# Altium PCB PCB1.PcbDoc (part 2 of 2)
Units mil, origin at the board's own origin, x right, y up, seen from the top; angles counter-clockwise.
Board outline 3190 x 3156 mil, 4 copper layers (Component Side, Ground Plane, Power Plane, Solder Side), stack 33.234 mil thick; 104 components, 96 nets, 451 pads, 130 vias.
Unrouted connection lines stored in the file: 23.
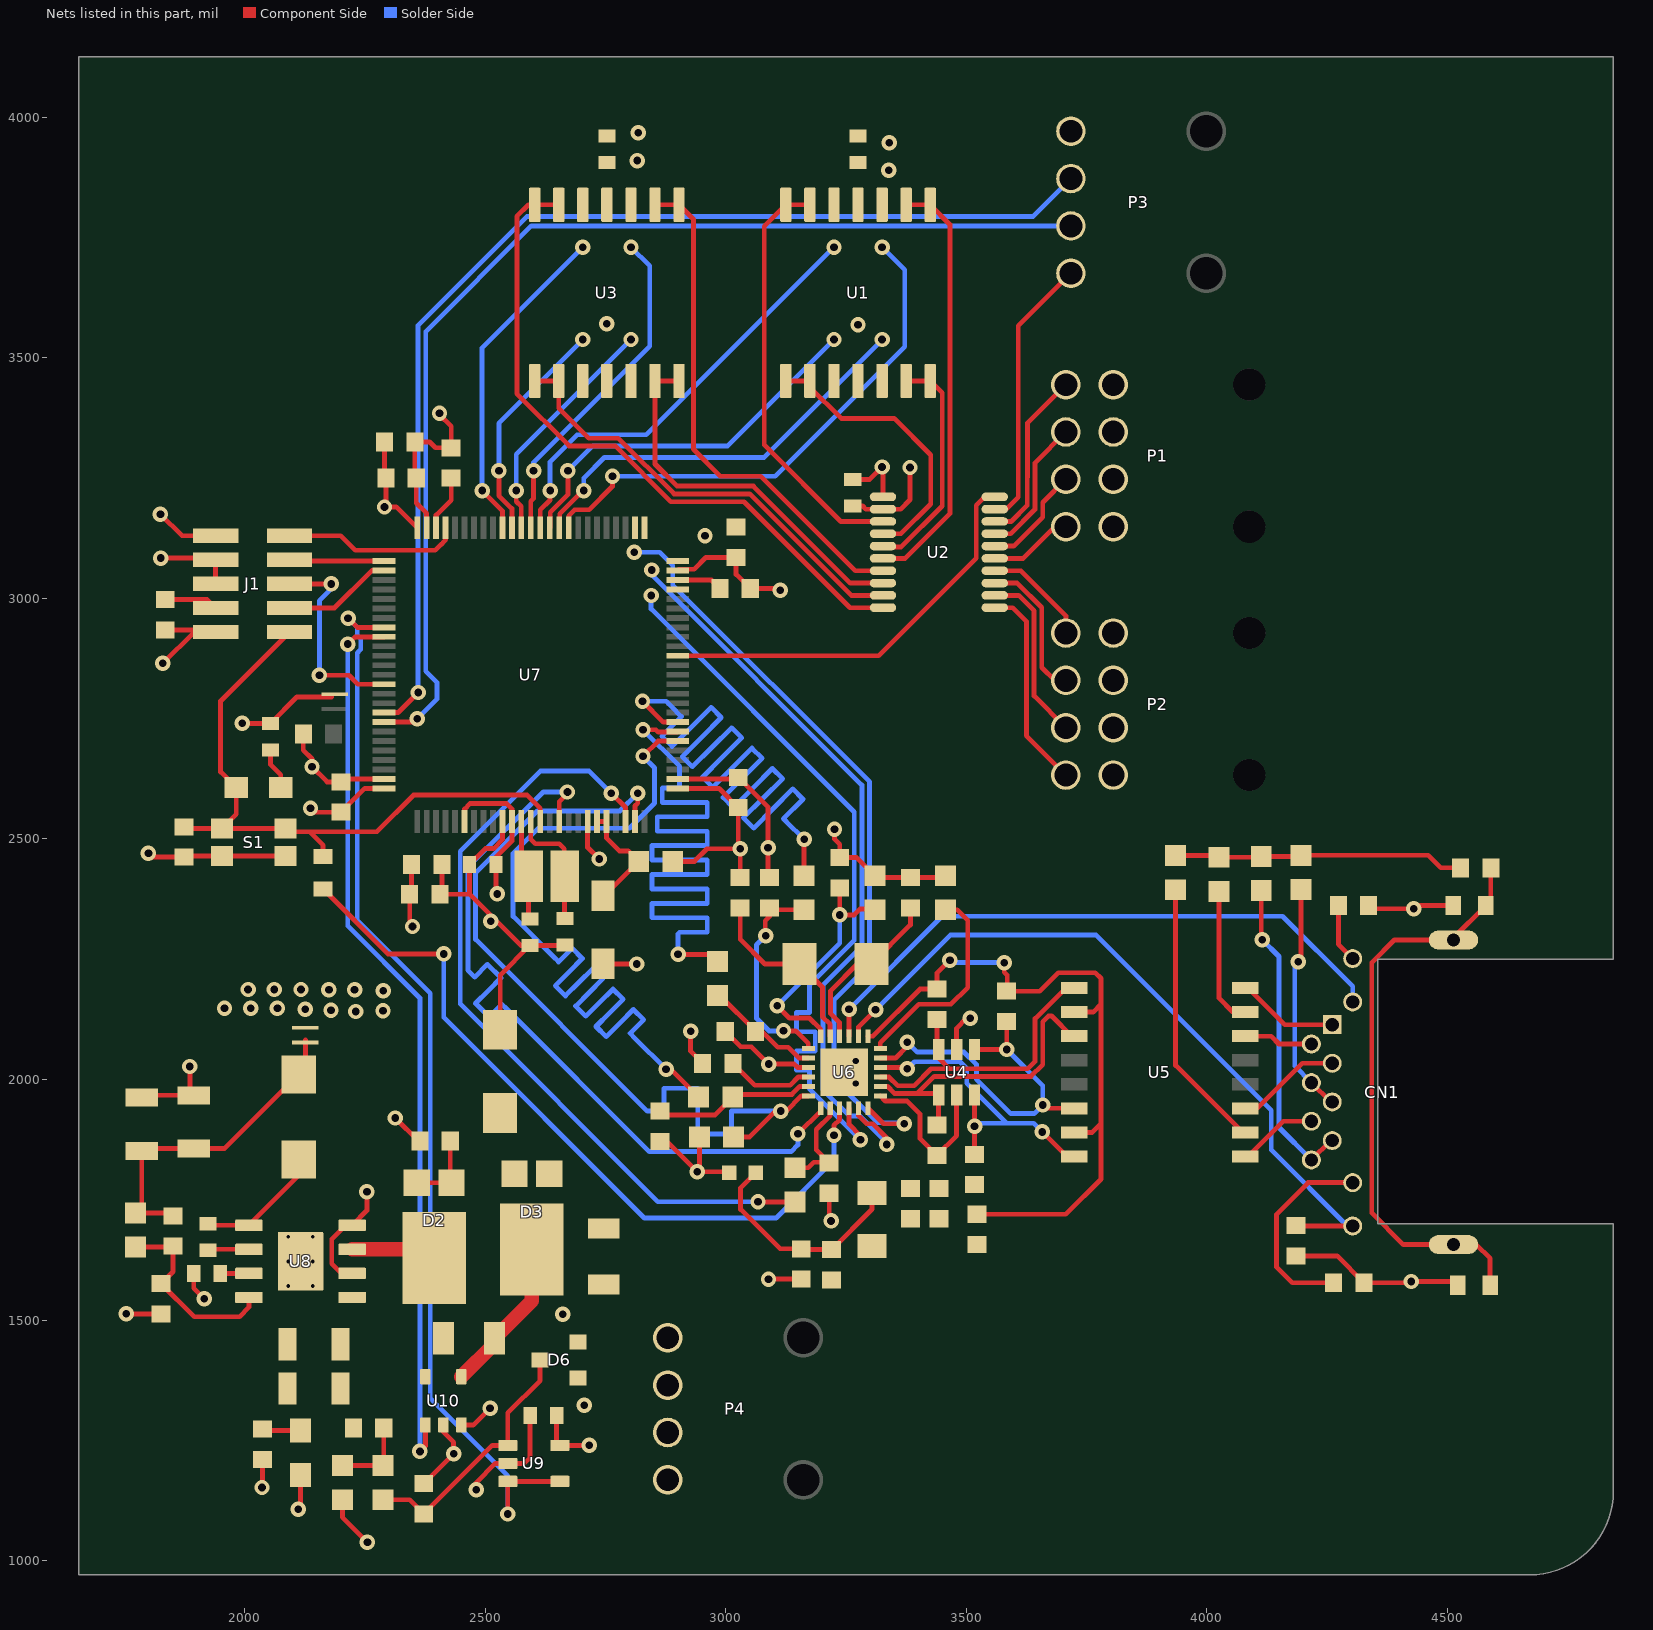
[diagram p4: the nets of this part, all layers, seen from the top]

## Via types
v1: diameter 32, hole 16, Component Side to Solder Side, 84 vias
v2: diameter 32, hole 16, Component Side to Solder Side, tented both sides, 38 vias
v3: diameter 19.68, hole 7.87, Component Side to Solder Side, tented top, 6 vias
v4: diameter 25.98, hole 12.99, Component Side to Solder Side, 2 vias

## Nets (pads, with @x,y where several pads share a name; then routed paths per layer and width w, separated by ;. In a path a pad name is that pad's centre, name@x,y a point inside that pad or via, vN(x,y) a via of type N, cw(c..) or ccw(c..) an arc to the next point about the centre after c; other vN are vias at no path point) (continued)
CURR_SENSE_BATT: U7.84 U10.1 | length 1881.2
  Component Side w10: v1(2214.48,2905) 2229.48,2920 U7.84@2289.76,2920 ; v1(2364.39,1226.9) 2375.67,1238.18 U10.1@2375.67,1281.7
  Solder Side w10: v1(2214.48,2905) 2214.48,2319.22 2364.39,2169.32 v1(2364.39,1226.9)
EGND: C10.1 CN1.13 CN1.14 SB2.1 SB3.1 | length 1232.5
  Component Side w10: SB2.1@4588.75,1572.41 4588.75,1628.15 4560.09,1656.81 CN1.14@4512.62,1656.81 4408.66,1656.81 4342.87,1722.59 4342.87,2242.87 4389.88,2289.88 CN1.13@4512.62,2289.88 4512.62,2293.99 SB3.1@4580,2361.38 4590.25,2371.62 C10.1@4590.25,2440
ESC1_5V: P1.1 U2.18 | length 365.9
  Component Side w10: U2.18@3559.14,3159.8 3593.52,3159.8 3626.85,3193.13 3626.85,3251.66 3627,3251.81 3627,3364.21 P1.1@3707.06,3444.28
ESC1_BUF: U1.13 U1.14 U2.3 | length 880.6
  Component Side w10: U1.13@3175,3818.07 U1.14@3125,3818.07 3079.92,3772.99 3079.92,3319.08 3239.2,3159.8 U2.3@3326.86,3159.8
ESC1_SIG: U1.12 U7.62 | length 920.8
  Component Side w10: U7.62@2614.57,3146.38 2614.57,3184 2635,3204.43 v2(2635,3224)
  Solder Side w10: v2(2635,3224) 2635,3284 2691,3340 2835,3340 v2(3225,3730)
ESC2_5V: P1.2 U2.17 | length 292.3
  Component Side w10: U2.17@3559.14,3134.21 3592.21,3134.21 3642.85,3184.85 3642.85,3245.04 3643,3245.19 3643,3281.79 P1.2@3707.06,3345.85
ESC2_BUF: U1.1 U1.2 U2.4 | length 599
  Component Side w10: U1.1@3125,3451.93 U1.2@3175,3451.93 3175,3439 3240,3374 3350,3374 3426,3298 3426,3196.13 3364.09,3134.21 U2.4@3326.86,3134.21
ESC2_SIG: U1.3 U7.61 | length 800.3
  Component Side w10: U7.61@2634.25,3146.38 2635.25,3147.38 2635.25,3178.63 2672,3215.38 v2(2672,3265)
  Solder Side w10: v2(2672,3265) 2724,3317 3004,3317 v2(3225,3538)
ESC3_5V: P1.3 U2.16 | length 223.2
  Component Side w10: U2.16@3559.14,3108.62 3598.62,3108.62 3658.85,3168.85 3658.85,3199.21 P1.3@3707.06,3247.43
ESC3_BUF: U1.6 U1.7 U2.5 | length 479.3
  Component Side w10: U2.5@3326.86,3108.62 3328.48,3107 3365,3107 3450,3192 3450,3426.93 U1.7@3425,3451.93 U1.6@3375,3451.93
ESC3_SIG: U1.5 U7.60 | length 865.1
  Component Side w10: U7.60@2653.94,3146.38 2654.94,3147.38 2654.94,3175.69 2703.25,3224 v2(2705,3224)
  Solder Side w10: v2(2705,3224) 2705,3250 2748,3293 3080,3293 v2(3325,3538)
ESC4_5V: P1.4 U2.15 | length 175.3
  Component Side w10: U2.15@3559.17,3083 3618,3083 3684,3149 P1.4@3707.06,3149
ESC4_BUF: U1.8 U1.9 U2.6 | length 886.8
  Component Side w10: U2.6@3326.86,3083.03 3373.25,3083.03 3466,3175.78 3466,3777.07 U1.8@3425,3818.07 U1.9@3375,3818.07
ESC4_SIG: U1.10 U7.59 | length 1108.2
  Component Side w10: U7.59@2673.62,3146.38 2673.62,3171.75 2685.87,3184 2716,3184 2764.69,3232.69 v2(2764.69,3254)
  Solder Side w10: v2(2764.69,3254) 3103,3254 3372,3523 3372,3683 v2(3325,3730)
ESC5_5V: P2.1 U2.14 | length 222.7
  Component Side w10: U2.14@3559.14,3057.44 3613.56,3057.44 3707.06,2963.94 P2.1@3707.06,2927.92
ESC5_BUF: U2.7 U3.8 U3.9 | length 1069
  Component Side w10: U3.9@2853,3818.07 U3.8@2903,3818.07 2933,3788.07 2933,3310 2989,3254 3072.62,3254 3269.18,3057.44 U2.7@3326.86,3057.44
ESC5_SIG: U3.10 U7.63 | length 702.1
  Component Side w10: U7.63@2594.88,3146.38 2594.88,3201.97 2600.63,3207.72 v2(2600.63,3265)
  Solder Side w10: v2(2600.63,3265) 2600.63,3282.63 2842,3524 2842,3691 v2(2803,3730)
ESC6_5V: P2.2 U2.13 | length 304.8
  Component Side w10: U2.13@3559.14,3031.85 3606.15,3031.85 3657,2981 3657,2856.25 3683.76,2829.49 P2.2@3707.06,2829.49
ESC6_BUF: U2.8 U3.6 U3.7 | length 799
  Component Side w10: U3.7@2903,3451.93 U3.6@2853,3451.93 2853,3279.25 2898.81,3233.45 3057.55,3233.45 3259.15,3031.85 U2.8@3326.86,3031.85
ESC6_SIG: U3.5 U7.64 | length 494.7
  Component Side w10: v2(2564.63,3224) 2564.63,3201.37 2575,3191 2575,3146.57 U7.64@2575.2,3146.38
  Solder Side w10: v2(2564.63,3224) 2564.63,3299.63 v2(2803,3538)
ESC7_5V: P2.3 U2.12 | length 365.7
  Component Side w10: U2.12@3559.14,3006.26 3609.11,3006.26 3641,2974.37 3641,2797.13 P2.3@3707.06,2731.07
ESC7_BUF: U2.9 U3.1 U3.2 | length 941.4
  Component Side w10: U3.1@2603,3451.93 U3.2@2653,3451.93 2653,3395.63 2715.63,3333 2776.63,3333 2892.63,3217 3050,3217 3260.74,3006.26 U2.9@3326.86,3006.26
ESC7_SIG: U3.3 U7.65 | length 475
  Component Side w10: v2(2528.63,3265) 2528.63,3213.37 2555.51,3186.49 U7.65@2555.51,3146.38
  Solder Side w10: v2(2528.63,3265) 2528.63,3363.63 v2(2703,3538)
ESC8_5V: P2.4 U2.11 | length 431.1
  Component Side w10: U2.11@3559.14,2980.67 3596.33,2980.67 3625,2952 3625,2714.71 P2.4@3707.06,2632.64
ESC8_BUF: U2.10 U3.13 U3.14 | length 1410.7
  Component Side w10: U3.13@2653,3818.07 U3.14@2603,3818.07 2590.07,3818.07 2566,3794 2566,3425.35 2674.35,3317 2770,3317 2886,3201 3038,3201 3258.33,2980.67 U2.10@3326.86,2980.67
ESC8_SIG: U3.12 U7.66 | length 687.8
  Component Side w10: v2(2493.63,3224) 2535.83,3181.8 U7.66@2535.83,3146.38
  Solder Side w10: v2(2493.63,3224) 2493.63,3520.63 v2(2703,3730)
GND: C1.2 C2.2 C3.2 C4.2 C5.1 C6.1 C7.1 C8.1 C9.1 C11.2 C12.2 C13.1 C14.1 C15.1 C16.1 C17.1 C18.1 C19.1 C20.1 C21.1 C22.1 C23.1 C24.1 C25.1 C26.2 C27.1 C29.1 C30.1 C32.1 C33.1 C34.1 C35.1 C36.2 C37.1 D5.2 D6.1 J1.3 J1.5 J1.9 P1.5 P1.6 P1.7 P1.8 P2.5 P2.6 P2.7 P2.8 P3.4 P4.1 P4.2 R10.1 R16.2 R20.1 R21.1 R22.1 R23.1 R25.2 R26.1 R27.1 R31.1 R32.1 S1.2 SB2.2 SB3.2 U1.11 U2.1 U3.11 U4.2 U6.25 U7.10 U7.19 U7.26 U7.49 U7.74 U7.99 U8.6 U8.8 U8.9 U9.2 U10.2 | length 5235.7
  Component Side w10: v1(1754.06,1512.81) R31.1@1826.22,1512.81 ; C33.1@1786.22,1962.02 1791.22,1967.02 C32.1@1894.4,1967.02 1886.22,1975.19 v1(1886.22,2026.9) ; v1(1800,2470) 1807.91,2462.09 C18.1@1873.98,2462.09 1876.57,2464.69 S1.2@1952.91,2464.69 S1.2@2084.8,2464.69 ; v1(1825.83,3083.74) 1936.01,3083.74 J1.3@1939.75,3080 J1.5@1939.75,3030 ; v1(1830,2865) 1895,2930 J1.9@1939.75,2930 1935.22,2934.53 R23.1@1835,2934.53 R23.1@1830,2929.53 ; C35.1@1894.4,1596.9 1894.4,1566.13 v1(1916.22,1544.3) ; v1(2036.22,1151.9) 2037.48,1153.16 R27.1@2037.48,1210.4 ; R25.2@2121.97,2718.11 2121.97,2684.63 2140,2666.6 v1(2140,2650) 2171.47,2618.53 C21.1@2200,2618.53 2200,2624.72 U7.99@2289.76,2624.72 ; R32.1@2203.23,1126.46 2203.23,1089.89 v1(2255.22,1037.9) ; U8.6@2223.5,1596.9 2201.22,1596.9 2181.22,1616.9 2181.22,1668.16 2209.96,1696.9 U8.8@2223.5,1696.9 2254.25,1727.65 v1(2254.25,1766.9) ; v1(2313.31,1919.86) 2360.92,1872.25 R26.1@2364.39,1872.25 ; C34.1@2372.36,1159.89 v1(2434.37,1221.9) 2434.37,1246.09 2413.07,1267.39 U10.2@2413.07,1281.7 ; U7.74@2378.35,3146.38 2378.35,3176.65 2356.73,3198.27 C20.1@2356.73,3250 2353.78,3252.95 C23.1@2353.78,3325 2384.79,3325 2396.8,3312.99 C25.1@2429.32,3312.99 2429.32,3357.81 2405,3382.13 v1(2405,3385) ; C22.1@2410,2447 2410,2388.94 C27.1@2406.06,2385 2468.06,2385 ; v1(2481.22,1146.9) 2481.22,1161.9 2521.22,1201.9 U9.2@2547.09,1201.9 2581.22,1201.9 2593.44,1214.12 C36.2@2593.44,1301.9 ; D5.2@2531.22,2103.51 2531.22,2216.96 C16.1@2592.91,2278.65 C17.1@2665.46,2278.65 ; U7.10@2535.83,2536.14 2535.83,2498.45 2517.37,2480 2500.44,2480 C37.1@2467.44,2447 2467.44,2385.62 2468.06,2385 ; 2574.41,2278.65 2524.06,2329 v1(2511.54,2329) 2511.54,2341.52 2468.06,2385 ; D6.1@2692.95,1379.5 D6.1@2693.45,1379 ; U7.19@2712.99,2536.14 2712.99,2482.15 v1(2736.81,2458.33) ; C26.2@2890,2453.23 2934.82,2453.23 2961.09,2479.5 v1(3030,2479.5) ; U7.26@2900,2605.04 2986.02,2605.04 C7.1@3026.02,2565.04 3026.02,2483.48 v1(3030,2479.5) ; U7.49@2900,3057.8 2902.69,3060.48 2934.5,3060.48 2959.02,3085 C19.1@3021.42,3085 3021.42,3049.92 C24.1@3050.94,3020.39 3109.81,3020.39 v1(3113.2,3017) ; v1(2927,2100) 2927,2058.59 R10.1@2952.01,2033.58 ; C15.1@3030,2419.55 v1(3030,2479.5) ; v1(3089,1585) C13.1@3157,1585.01 ; v1(3226,2520) 3226,2500 3237,2489 C12.2@3237,2461.19 3272.46,2461.19 C6.1@3310.17,2423.49 3314.1,2419.55 C5.1@3384,2419.55 3453.06,2419.55 R16.2@3457,2423.49 ; C1.2@3264,3247.12 3299.12,3247.12 v1(3325,3273) 3326.86,3271.14 U2.1@3326.86,3210.98 ; U4.2@3479.82,2062.24 3479.82,2106.55 3500.27,2127 v1(3508,2127) ; R21.1@4185,1633.19 4270.71,1633.19 R22.1@4326.5,1577.41 4422.41,1577.41 v1(4425,1580) 4513.66,1580 SB2.2@4521.25,1572.41 ; R20.1@4336.5,2361.38 4342.87,2355 v1(4430,2355) 4436.38,2361.38 SB3.2@4512.5,2361.38
  other v1: 2706,1323 3339,3890 2816,3910
  other v3: 2090.63,1570.72 2141.81,1570.72 2090.63,1621.9 2141.81,1621.9 2090.63,1673.08 2141.81,1673.08
  other v4: 3270.13,1991.38 3270.13,2038.62
I2C1_SCL: P3.3 U7.92 | length 2334.6
  Component Side w10: U7.92@2289.76,2762.52 2318.78,2762.52 v1(2360.59,2804.33)
  Solder Side w10: v1(2360.59,2804.33) 2360.59,3567.59 2587,3794 3638.93,3794 P3.3@3717.5,3872.57
I2C1_SDA: P3.2 U7.93 | length 2335.2
  Component Side w10: U7.93@2289.76,2742.83 2351.93,2742.83 v1(2358.66,2749.57)
  Solder Side w10: v1(2358.66,2749.57) 2399.79,2790.69 2399.79,2825.21 2376.59,2848.41 2376.59,3554.59 2596.15,3774.15 P3.2@3717.5,3774.15
LOGIC_EN: U2.20 U7.40 | length 860.4
  Component Side w10: U7.40@2900,2880.63 3317.63,2880.63 3520.58,3083.58 3520.58,3193.62 3537.95,3210.98 U2.20@3559.14,3210.98
NetC4_1: C4.1 C8.2 C9.2 C11.1 C13.2 C14.2 L1.1 R1.2 R2.2 R6.2 R7.2 U4.5 U5.2 U5.7 U6.1 U6.19 | length 2285.6
  Component Side w10: L1.1@3062,1806 3031,1775 3031,1730 3113,1648 C13.2@3157,1648 3158.5,1646.5 C14.2@3220.3,1646.5 3304,1730.2 C11.1@3304,1763.98 ; U6.1@3295.73,2089.8 3305.8,2089.8 3403.99,2187.99 R7.2@3439,2187.99 3439,2221 v1(3466,2248) ; U6.19@3321.32,1965.79 3332.1,1955 3377,1955 3404,1928 3404,1877.01 R2.2@3439,1842.01 3479.82,1882.83 U4.5@3479.82,1967.76 ; C9.2@3522,1719.8 3706.8,1719.8 3780,1793 3780,1908 ; v1(3579,2242.87) 3579,2223 3585,2217 3585,2184.5 R6.2@3584,2183.5 3652.5,2183.5 3691,2222 3768,2222 3780,2210 3780,2156.33 ; U5.7@3724.88,1890 3762,1890 3780,1908 ; U5.2@3724.88,2140 3763.67,2140 3780,2156.33 ; 3780,1908 3780,2156.33
  Solder Side w10: v1(3466,2248) 3471.13,2242.87 v1(3579,2242.87)
NetC5_2: C5.2 U6.4 X1.2 | length 360.2
  Component Side w10: U6.4@3236.67,2089.8 3236.67,2118.33 3218,2137 3218,2184.17 3273.83,2240 X1.2@3302.8,2240 3384,2321.2 C5.2@3384,2356.56
NetC6_2: C6.2 C12.1 U6.6 | length 502.5
  Component Side w10: v1(3107,2153) 3132.2,2127.8 3173.46,2127.8 3197.3,2103.96 U6.6@3197.3,2089.8 ; C12.1@3237,2398.2 v1(3237,2342) 3267,2342 3279,2354 3308.79,2354 C6.2@3310.17,2352.62
  Solder Side w10: v1(3107,2153) 3237,2283 v1(3237,2342)
NetC10_2: C10.2 R11.1 R12.1 R13.1 R14.1 | length 606.1
  Component Side w10: R11.1@3935,2465.33 4021.46,2465.33 R12.1@4025,2461.79 4111.58,2461.79 R14.1@4113.15,2463.36 4193.27,2463.36 R13.1@4195.78,2465.87 4460.33,2465.87 4486.2,2440 C10.2@4527.25,2440
NetC15_2: C15.2 U6.5 X1.1 | length 386.5
  Component Side w10: C15.2@3030,2356.56 3030,2291 3081,2240 X1.1@3153.2,2240 3201,2192.2 3201,2130.7 3216.99,2114.72 U6.5@3216.99,2089.8
NetC24_2: C24.2 U7.48 | length 95.3
  Component Side w10: U7.48@2900,3038.11 2970.23,3038.11 C24.2@2987.95,3020.39
NetC25_2: C25.2 U7.73 | length 116.6
  Component Side w10: U7.73@2398.03,3146.38 2398.03,3173.03 2429.32,3204.32 C25.2@2429.32,3250
NetC28_1: C28.1 L2.1 U8.1 | length 265.3
  Component Side w10: C28.1@1924.33,1700.36 1927.8,1696.9 U8.1@2008.94,1696.9 2112.48,1800.44 L2.1@2112.48,1833.31
NetC28_2: C28.2 U8.2 | length 85.3
  Component Side w10: C28.2@1924.33,1645.24 1925.98,1646.9 U8.2@2008.94,1646.9
NetC31_1: C31.1 R28.1 R31.2 U8.4 | length 406.9
  Component Side w10: C31.1@1772.9,1651.46 1849.29,1651.46 R28.1@1851.22,1653.39 1851.22,1600.8 R31.2@1826.22,1575.8 1895.12,1506.9 1989.49,1506.9 2008.94,1526.35 U8.4@2008.94,1546.9
NetC31_2: C31.2 C32.2 C33.2 J3.1 L2.2 R28.2 | length 684.8
  Component Side w10: R28.2@1851.22,1716.39 1845.28,1722.33 C31.2@1772.9,1722.33 1786.22,1735.65 C33.2@1786.22,1851.78 1791.22,1856.78 C32.2@1894.4,1856.78 1958.78,1856.78 L2.2@2112.48,2010.48 2126.22,2024.22 2126.22,2081.82
NetC34_2: C34.2 D6.3 R30.2 U9.1 | length 536
  Component Side w10: R30.2@2287.69,1126.46 2342.8,1126.46 C34.2@2372.36,1096.9 2514.76,1239.3 U9.1@2547.09,1239.3 2547.09,1307.02 2614.21,1374.14 D6.3@2614.21,1416.9
NetC35_2: C35.2 U8.3 | length 59.4
  Component Side w10: C35.2@1949.51,1596.9 U8.3@2008.94,1596.9
NetCN1_1: CN1.1 U5.16 | length 212.2
  Component Side w10: U5.16@4080,2190 4085.71,2190 4161.82,2113.9 CN1.1@4260.65,2113.9
NetCN1_2: CN1.2 U5.14 | length 144.1
  Component Side w10: U5.14@4080,2090 4133.74,2090 4150,2073.74 CN1.2@4217.34,2073.74
NetCN1_3: CN1.3 U5.11 | length 219.4
  Component Side w10: U5.11@4080,1940 4105,1940 4198.58,2033.58 CN1.3@4260.65,2033.58
NetCN1_4: CN1.4 CN1.5 R13.2 | length 481.3
  Component Side w10: v2(4190,2244.53) 4195.78,2250.31 R13.2@4195.78,2395 ; CN1.4@4217.34,1993.43 4257.5,1953.27 CN1.5@4260.65,1953.27
  Solder Side w10: v2(4190,2244.53) 4182.66,2237.18 4182.66,2028.11 CN1.4@4217.34,1993.43
NetCN1_6: CN1.6 U5.9 | length 167.6
  Component Side w10: U5.9@4080,1840 4085.71,1840 4158.82,1913.11 CN1.6@4217.34,1913.11
NetCN1_7: CN1.7 CN1.8 R14.2 | length 662.8
  Component Side w10: R14.2@4113.15,2392.49 4113.15,2292.44 v2(4115,2290.59) ; CN1.8@4217.34,1832.8 4257.5,1872.95 CN1.7@4260.65,1872.95
  Solder Side w10: v2(4115,2290.59) 4150,2255.59 4150,1900.14 CN1.8@4217.34,1832.8
NetCN1_9: CN1.9 R20.2 | length 122.4
  Component Side w10: R20.2@4273.5,2361.38 4273.5,2280.96 CN1.9@4303.17,2251.3
NetCN1_10: CN1.10 U6.3 | length 1275.7
  Component Side w10: U6.3@3256.36,2089.8 v1(3256.36,2146)
  Solder Side w10: v1(3256.36,2146) 3449.57,2339.21 4157.34,2339.21 4303.17,2193.38 CN1.10@4303.17,2161.14
NetCN1_11: CN1.11 R22.2 | length 427.3
  Component Side w10: R22.2@4263.5,1577.41 4177.59,1577.41 4145,1610 4145,1720 4210.55,1785.55 CN1.11@4303.17,1785.55
NetCN1_12: CN1.12 R21.2 U6.2 | length 1543
  Component Side w10: U6.2@3276.04,2089.8 3276.04,2109.53 v1(3311.51,2145) ; R21.2@4185,1696.19 4185.79,1695.39 CN1.12@4303.17,1695.39
  Solder Side w10: v1(3311.51,2145) 3466.57,2300.06 3769.94,2300.06 4134,1936 4134,1853.66 4292.26,1695.39 CN1.12@4303.17,1695.39
NetD1_2: D1.2 R24.1 | length 87
  Component Side w10: R24.1@2053.9,2685 2053.9,2654.32 2075,2633.22 D1.2@2075,2606.72
NetD2_1: D2.1 R26.2 | length 160.4
  Component Side w10: D2.1@2357.69,1785.4 D2.1@2430.13,1785.4 2427.38,1788.16 R26.2@2427.38,1872.25
NetD3_1: D3.1 D5.1 F1.2
NetD4_1: D4.1 R27.2 | length 80
  Component Side w10: R27.2@2037.48,1273.39 2040.58,1270.3 D4.1@2116.22,1270.3
NetJ1_7: J1.7 R23.2 | length 112
  Component Side w10: R23.2@1835,2997.52 1922.23,2997.52 J1.7@1939.75,2980
NetR3_1: R3.1 R8.2 U6.8 | length 242.6
  Component Side w10: R8.2@2983,2174.57 2987.43,2174.57 R3.1@3062,2100 3075,2100 3108,2067 3130,2067 3152.47,2044.53 U6.8@3171.71,2044.53
NetR4_1: R4.1 R9.2 U6.7 | length 455.4
  Component Side w10: v1(3083.14,2299) 3082,2300.14 3082,2330 3091,2339 R4.1@3091,2356.56 3094.94,2352.62 R9.2@3163,2352.62 ; v1(3120,2101) 3145.7,2101 3171.71,2074.99 U6.7@3171.71,2064.21
  Solder Side w10: v1(3083.14,2299) 3064,2279.86 3064,2127 3090,2101 v1(3120,2101)
NetR5_1: R5.1 R15.2 U6.11 | length 337.2
  Component Side w10: R5.1@2863,1934.29 2871.29,1926 2978,1926 2978,1926.76 R15.2@3014.46,1963.23 3020.24,1969 3137.63,1969 3154.1,1985.47 U6.11@3171.71,1985.47
NetR10_2: R10.2 U6.10 | length 182.7
  Component Side w10: R10.2@3015,2033.58 3060.58,1988 3134,1988 3151.16,2005.16 U6.10@3171.71,2005.16
NetR11_2: R11.2 U5.10 | length 567.9
  Component Side w10: R11.2@3935,2394.46 3935,2029.29 4074.29,1890 U5.10@4080,1890
NetR12_2: R12.2 U5.15 | length 288.7
  Component Side w10: R12.2@4025,2390.92 4025,2169.45 4054.45,2140 U5.15@4080,2140
NetR16_1: R16.1 U6.24 | length 436.1
  Component Side w10: U6.24@3321.32,2064.21 3321.32,2076.06 3401.43,2156.18 3468.18,2156.18 3503,2191 3503,2331 3481.38,2352.62 R16.1@3457,2352.62
NetR18_2: R18.2 R19.2 U6.14 | length 211.2
  Component Side w10: R19.2@3144,1816.43 3171.43,1816.43 3183,1828 R18.2@3213.5,1828 ; R18.2@3215,1826.5 R18.2@3213.5,1828 ; U6.14@3216.99,1940.2 3216.99,1924.99 3188,1896 3188,1853.5 R18.2@3213.5,1828
NetR29_1: R29.1 R30.1 R32.2 | length 163.1
  Component Side w10: R32.2@2203.23,1197.33 R30.1@2287.69,1197.33 2289.21,1198.85 R29.1@2289.21,1275.35
NetSB1_2: SB1.2 U6.15 | length 1585.4
  Component Side w10: SB1.2@2163,2395.86 2297.93,2260.93 v2(2414,2260.93) ; v2(3225,1884) 3225,1904.76 3236.67,1916.43 U6.15@3236.67,1940.2
  Solder Side w10: v2(2414,2260.93) 2414,2129 2831,1712 3105.2,1712 3225,1831.8 v2(3225,1884)
NRST: C18.2 D1.1 J1.10 S1.1 SB1.1 U7.14 | length 1371.5
  Component Side w10: C18.2@1873.98,2525.08 1877.29,2521.77 S1.1@1952.91,2521.77 ; J1.10@2093.29,2930 1950,2786.71 1950,2639.2 D1.1@1982.48,2606.72 1982.48,2551.34 S1.1@1952.91,2521.77 ; SB1.1@2163,2463.36 2163,2487 2135,2515 ; U7.14@2614.57,2536.14 2614.57,2563.43 2587,2591 2351,2591 2275,2515 2135,2515 ; S1.1@1952.91,2521.77 S1.1@2084.8,2521.77 2091.57,2515 2135,2515
OSC_IN: C16.2 U7.12 Y1.1 | length 209.7
  Component Side w10: U7.12@2575.2,2536.14 2575.2,2437.42 Y1.1@2590.2,2422.42 2590.2,2336.48 C16.2@2592.91,2333.76
OSC_OUT: C17.2 U7.13 Y1.2 | length 260.2
  Component Side w10: U7.13@2594.88,2536.14 2594.88,2499.57 2604.45,2490 2653.94,2490 2664.43,2479.5 2664.43,2422.99 Y1.2@2665,2422.42 2665,2335.75 C17.2@2666.22,2334.53
RD_N: R1.1 U4.6 U5.8 U6.22 | length 703.2
  Component Side w10: U6.22@3321.32,2024.84 3374.54,2024.84 v1(3377.38,2022) ; R1.1@3517.22,1844.5 v2(3517.22,1903) U4.6@3517.22,1967.76 ; v2(3658,1891) 3709,1840 U5.8@3724.88,1840
  Solder Side w10: v1(3377.38,2022) 3392.38,2037 3487,2037 3501,2023 3501,1992 3584,1909 ; v2(3517.22,1903) 3523.22,1909 3584,1909 ; v2(3658,1891) 3640,1909 3584,1909
RD_P: R6.1 U4.1 U5.6 U6.23 | length 783.6
  Component Side w10: U6.23@3321.32,2044.53 3352.93,2044.53 3377.38,2068.98 v1(3377.38,2077.54) ; U4.1@3517.22,2062.24 v2(3584,2062.24) R6.1@3584,2120.5 ; v2(3659,1947) 3666,1940 U5.6@3724.88,1940
  Solder Side w10: v1(3377.38,2077.54) 3397.92,2057 3495.28,2057 3521,2031.28 3521,2000.28 3592.28,1929 3641,1929 v2(3659,1947) 3659,1987.24 v2(3584,2062.24)
RMII_CRS_DV: R15.1 U7.31 | length 1762.3
  Component Side w10: v2(2828,2672) 2859.46,2703.46 U7.31@2900,2703.46 ; v1(2876,2021) 2885.83,2021 R15.1@2943.6,1963.23
  Solder Side w10: v2(2828,2672) 2852,2648 2852,2612.63 2852,2574 2800,2522 2610,2522 2558,2470 2558,2339 2642,2255 2652.61,2244.39 2680.89,2272.68 2702.1,2251.46 2673.82,2223.18 2645.54,2194.9 2666.75,2173.68 2695.03,2201.97 2723.32,2230.25 2744.53,2209.04 2716.25,2180.75 2687.96,2152.47 2709.18,2131.26 2737.46,2159.54 2765.74,2187.82 2786.96,2166.61 2758.67,2138.33 2730.39,2110.04 2751.6,2088.83 2779.89,2117.11 2808.17,2145.4 2829.38,2124.19 2801.1,2095.9 2811,2086 v1(2876,2021)
RMII_MDC: U6.13 U7.16 | length 1647.9
  Component Side w10: U7.16@2653.94,2536.14 2653.94,2577.58 2671,2594.65 v2(2671,2597.54) ; v2(3150.06,1887) 3197.3,1934.24 U6.13@3197.3,1940.2
  Solder Side w10: v2(2671,2597.54) 2620.54,2597.54 2464,2441 2464,2227 2478.14,2212.86 2504.63,2239.35 2532.92,2211.07 2506.43,2184.57 2479.93,2158.08 2508.22,2129.8 2534.71,2156.29 2544.5,2146.5 2841,1850 3136,1850 3150.06,1864.06 v2(3150.06,1887)
RMII_MDIO: R17.2 U6.12 U7.24 | length 1768.2
  Component Side w10: U7.24@2811.42,2536.14 2811.42,2568.98 2817,2574.56 v2(2817,2595) ; R17.2@3016.46,1880.23 3049.23,1880.23 3103.29,1934.29 v2(3114.64,1934.29) 3125.55,1934.29 3157.04,1965.79 U6.12@3171.71,1965.79
  Solder Side w10: v2(2817,2595) 2780,2558 2608.5,2558 2480,2429.5 2480,2291 2836.71,1934.29 2871.71,1934.29 2871.71,1981.76 2941.71,1981.76 2941.71,1934.29 2941.71,1886.83 3011.71,1886.83 3011.71,1934.29 3074,1934.29 v2(3114.64,1934.29)
RMII_REF_CLK: R19.1 U7.23 | length 1657.1
  Component Side w10: v2(2762,2595) 2791.73,2565.27 U7.23@2791.73,2536.14 ; v1(3067,1746) 3067.43,1745.57 R19.1@3144,1745.57
  Solder Side w10: v2(2762,2595) 2716,2641 2614.46,2641 2448,2474.54 2448,2157 2859,1746 v1(3067,1746)
RMII_RXD0: R8.1 U7.32 | length 1746.5
  Component Side w10: v2(2828,2727) 2855,2727 2860,2722 2898.85,2722 U7.32@2900,2723.15 ; v1(2901,2260) 2968.43,2260 R8.1@2983,2245.43
  Solder Side w10: v2(2828,2727) 2904,2651 2904,2636 2904,2606 2868,2606 2868,2576 2904,2576 2961.46,2576 2961.46,2546 2904,2546 2857.62,2546 2857.62,2516 2904,2516 2961.46,2516 2961.46,2486 2904,2486 2846.54,2486 2846.54,2456 2904,2456 2961.46,2456 2961.46,2426 2904,2426 2846.54,2426 2846.54,2396 2904,2396 2961.46,2396 2961.46,2366 2904,2366 2846.54,2366 2846.54,2336 2904,2336 2961.46,2336 2961.46,2306 2904,2306 2901,2303 v1(2901,2260)
RMII_RXD1: R9.1 U7.33 | length 1770.5
  Component Side w10: v2(2827,2786) 2870.17,2742.83 U7.33@2900,2742.83 ; R9.1@3163,2423.49 v1(3163,2499)
  Solder Side w10: v2(2827,2786) 2876,2786 2886.61,2775.39 2907.82,2754.18 2867.19,2713.55 2888.4,2692.33 2929.03,2732.97 2969.67,2773.6 2990.88,2752.39 2950.25,2711.75 2909.61,2671.12 2930.83,2649.91 2971.46,2690.54 3012.09,2731.17 3033.31,2709.96 2992.67,2669.33 2952.04,2628.69 2973.25,2607.48 3013.89,2648.11 3054.52,2688.75 3075.73,2667.53 3035.1,2626.9 2994.47,2586.27 3015.68,2565.05 3056.31,2605.69 3096.95,2646.32 3118.16,2625.11 3077.53,2584.47 3036.89,2543.84 3058.11,2522.63 3098.74,2563.26 3139.37,2603.89 3160.58,2582.68 3119.95,2542.05 3124.98,2537.02 v1(3163,2499)
RMII_TX_EN: U6.16 U7.47 | length 1595.9
  Component Side w10: U6.16@3256.36,1940.2 3256.36,1906.86 3280,1883.21 v2(3280,1874.64)
  Solder Side w10: v2(2845,3006) 2845,2977.95 3267,2555.95 3267,2289 3174,2196 3174,2154 3174,2139 3147,2139 3147,2099 3174,2099 3186,2099 3186,2059 3174,2059 3147,2059 3147,2019 3174,2019 3174,1999 3174,1980.64 v2(3280,1874.64)
RMII_TXD0: U6.17 U7.51 | length 1583.5
  Component Side w10: U6.17@3276.04,1940.2 3276.04,1924.69 3292.73,1908 3305.3,1908 3335,1878.3 v2(3335,1865)
  Solder Side w10: v2(2846,3059) 2846,3049 3283,2612 3283,2277 3202,2196 3202,1979 3256.8,1924.2 3278.8,1924.2 3335,1868 v2(3335,1865)
RMII_TXD1: U6.18 U7.52 | length 1631.9
  Component Side w10: U6.18@3295.73,1940.2 3327.92,1908 v2(3371,1908)
  Solder Side w10: v2(2810,3095.83) 2862.56,3095.83 2890,3068.38 2890,3027.63 3299,2618.63 3299,2239 3225,2165 3225,2001 3316.09,1909.91 3369.09,1909.91 v2(3371,1908)
TCK/SWCLK: J1.4 U7.76 | length 197.5
  Component Side w10: J1.4@2093.29,3080 2095.81,3077.48 U7.76@2289.76,3077.48
TD_N: R2.1 U4.4 U5.3 U6.20 | length 655.7
  Component Side w10: U6.20@3321.32,1985.47 3336.28,1985.47 3350.75,1971 3398.04,1971 ; R2.1@3439,1905 3442.42,1908.42 U4.4@3442.42,1967.76 3439.18,1971 3398.04,1971 ; U5.3@3724.88,2090 3719.17,2090 3677.17,2132 3671,2132 3659,2120 3659,2031 3634.31,2006.31 3433.35,2006.31 3398.04,1971
TD_P: R7.1 U4.3 U5.1 U6.21 | length 660.6
  Component Side w10: U6.21@3321.32,2005.16 3339.22,2005.16 3357.38,1987 3391.41,1987 3426.73,2022.31 3464.69,2022.31 ; R7.1@3439,2125 3439,2065.66 U4.3@3442.42,2062.24 3442.42,2044.58 3464.69,2022.31 ; U5.1@3724.88,2190 3706.37,2190 3643,2126.63 3643,2037.63 3627.69,2022.31 3464.69,2022.31
TDI: J1.8 U7.77 | length 228.7
  Component Side w10: J1.8@2093.29,2980 2186.6,2980 2261.71,3055.11 2262.04,3055.11 2264.73,3057.8 U7.77@2289.76,3057.8
TDO: J1.6 U7.89 | length 428.8
  Component Side w10: J1.6@2093.29,3030 v1(2180,3030) ; v1(2155.43,2840) 2216.93,2840 2235.36,2821.57 U7.89@2289.76,2821.57
  Solder Side w10: v1(2155.43,2840) 2155.43,2995 2180,3019.57 v1(2180,3030)
TMS/SWDIO: J1.2 U7.72 | length 370.9
  Component Side w10: J1.2@2093.29,3130 2200,3130 2230,3100 2396.06,3100 2407.94,3111.88 2408.59,3111.88 2415.03,3118.32 2415.03,3118.97 2417.72,3121.65 U7.72@2417.72,3146.38
VBATT_MEAS: U7.83 U9.3 U9.4 | length 2264.1
  Component Side w10: v1(2215,2958.82) 2234.13,2939.68 U7.83@2289.76,2939.68 ; v1(2547.09,1096.9) U9.3@2547.09,1164.5 U9.4@2655.35,1164.5
  Solder Side w10: v1(2215,2958.82) 2234.13,2939.68 2234.13,2923.53 2241.48,2916.18 2241.48,2893.82 2234.13,2886.47 2234.13,2330.87 2386,2179 2386,1337.12 2547.09,1176.03 v1(2547.09,1096.9)
VCC_3V3: C1.1 C2.1 C3.1 C7.2 C19.2 C20.2 C21.2 C22.2 C23.2 C27.2 C36.1 C37.2 D4.2 D6.2 FB1.1 J1.1 J2.2 J3.2 L1.2 R3.2 R4.2 R5.2 R17.1 R18.1 R24.2 U1.4 U2.2 U3.4 U6.9 U7.6 U7.11 U7.27 U7.50 U7.75 U7.100 U9.5 U10.3 | length 2612.5
  Component Side w10: v1(1825,3175) 1870,3130 J1.1@1939.75,3130 ; v1(1995,2740.12) R24.2@2053.9,2740.12 2108.78,2795 2181.26,2795 ; v1(2111.22,1106.9) 2116.22,1111.9 D4.2@2116.22,1177.78 ; v1(2136.88,2563.94) 2145.27,2555.54 C21.2@2200,2555.54 2249.5,2605.04 U7.100@2289.76,2605.04 ; C23.2@2290.79,3325 2290.79,3252.95 C20.2@2293.74,3250 2293.74,3192.95 v1(2290.79,3190) 2315.04,3190 U7.75@2358.66,3146.38 ; C22.2@2347.01,2447 2347.01,2388.94 C27.2@2343.07,2385 2343.07,2323.93 v1(2349,2318) ; U10.3@2450.47,1281.7 2474.96,1281.7 v1(2510.16,1316.9) ; U7.6@2457.09,2536.14 2457.09,2562.09 2468.37,2573.37 2545,2573.37 2555.51,2562.86 U7.11@2555.51,2536.14 2555.51,2495.51 2522.56,2462.56 C37.2@2522.56,2447 2522.56,2388.06 v1(2525,2385.62) ; C36.1@2648.56,1301.9 2648.56,1246.09 U9.5@2655.35,1239.3 2715.68,1239.3 v1(2716.22,1239.84) ; FB1.1@2745,2240.28 v1@2814.72,2240.28 ; R5.2@2863,1871.3 2877.7,1871.3 v1(2941,1808) ; U7.27@2900,2624.72 3022.72,2624.72 C7.2@3026.02,2628.03 3088,2566.06 v1(3088,2481.5) 3088,2422.55 R4.2@3091,2419.55 ; R17.1@2945.6,1880.23 2945.6,1812.6 v1(2941,1808) ; R3.2@2999.01,2100 3031.01,2068 3053.5,2068 v1(3089.5,2032) 3142.37,2032 3145.85,2028.53 3146.05,2028.53 3149.74,2024.84 U6.9@3171.71,2024.84 ; L1.2@3007,1806 3005,1808 v1(2941,1808) ; R18.1@3215,1763.5 3215,1710 v1(3219,1706) ; C1.1@3264,3192 3284.58,3192 3291.47,3185.11 3326.57,3185.11 U2.2@3326.86,3185.39 3363.39,3185.39 3383,3205 v1(3383,3272)
  other v1: 2661,1512 2231.08,2141.33 2287.66,2142.83 2179.5,2143.93 2126.22,2146.26 1958.15,2148.29 2012.88,2148.29 2068.15,2148.29 2288,2184.17 2007.15,2186.99 2061.88,2186.99 2117.15,2186.99 2175.22,2186.64 2228.5,2186.64 2815,2240 2957,3130 3275,3569 2753,3571 3340,3947 2818,3968
VCC_5V: P3.1 U2.19 | length 570.1
  Component Side w10: U2.19@3559.14,3185.39 3583.39,3185.39 3608,3210 3608,3566.22 P3.1@3717.5,3675.72
VCC_BATT: C29.2 C30.2 D2.2 R29.2 R33.2 U8.5 U8.7 U10.5 | length 178
  Component Side w30: U8.7@2223.5,1646.9 2375.65,1646.9 D2.2@2393.91,1628.63
VCC_BATT_PRESHUNT: D3.2 R33.1 U10.4 | length 325.5
  Component Side w30: U10.4@2450.47,1382.09 2519.37,1450.99 R33.1@2519.37,1461.9 2597.13,1539.65 D3.2@2597.13,1646.9
VCC_BATT_RAW: F1.1 P4.3 P4.4
VDDA: C26.1 FB1.2 U7.20 U7.21 | length 244.6
  Component Side w10: U7.20@2732.68,2536.14 U7.21@2752.36,2536.14 2752.36,2501.64 2778.95,2475.05 2797.31,2475.05 C26.1@2819.13,2453.23 2747.91,2382.01 FB1.2@2745,2382.01
pads on no net: P1. P2. P3. P4. U5.4 U5.5 U5.12 U5.13 U7.1 U7.2 U7.3 U7.4 U7.5 U7.7 U7.8 U7.9 U7.15 U7.17 U7.18 U7.22 U7.25 U7.28 U7.29 U7.30 U7.34 U7.35 U7.36 U7.37 U7.38 U7.39 U7.41 U7.42 U7.43 U7.44 U7.45 U7.46 U7.53 U7.54 U7.55 U7.56 U7.57 U7.58 U7.67 U7.68 U7.69 U7.70 U7.71 U7.78 U7.79 U7.80 U7.81 U7.82 U7.85 U7.86 U7.87 U7.88 U7.90 U7.91 U7.95 U7.96 U7.97 U7.98

## Polygon pours and split planes (outlines as drawn)
GND on Ground Plane (split plane): 4824.9,2270.1 4355,2270.1 4351.08,2269.71 4347.31,2268.57 4343.83,2266.71 4340.79,2264.21 4338.29,2261.17 4336.43,2257.69 4335.29,2253.92 4334.9,2250 4334.9,1700 4335.29,1696.08 4336.43,1692.31 4338.29,1688.83 4340.79,1685.79 4343.83,1683.29 4347.31,1681.43 4351.08,1680.29 4355,1679.9 4824.9,1679.9 4824.9,1144 4824.97,1143.29 4824.61,1133.01 4823.43,1122.08 4821.48,1111.27 4818.76,1100.61 4815.29,1090.18 4811.08,1080.03 4806.16,1070.2 4800.55,1060.74 4794.28,1051.71 4787.38,1043.15 4779.89,1035.11 4771.85,1027.62 4763.29,1020.72 4754.26,1014.45 4744.8,1008.84 4734.97,1003.92 4724.82,999.71 4714.39,996.24 4703.73,993.52 4692.92,991.57 4681.99,990.39 4671.71,990.03 4671,990.1 1675.1,990.1 1675.1,4105.9 4824.9,4105.9
VCC_3V3 on Power Plane (split plane): 4824.9,2270.1 4355,2270.1 4351.08,2269.71 4347.31,2268.57 4343.83,2266.71 4340.79,2264.21 4338.29,2261.17 4336.43,2257.69 4335.29,2253.92 4334.9,2250 4334.9,1700 4335.29,1696.08 4336.43,1692.31 4338.29,1688.83 4340.79,1685.79 4343.83,1683.29 4347.31,1681.43 4351.08,1680.29 4355,1679.9 4824.9,1679.9 4824.9,1144 4824.97,1143.29 4824.61,1133.01 4823.43,1122.08 4821.48,1111.27 4818.76,1100.61 4815.29,1090.18 4811.08,1080.03 4806.16,1070.2 4800.55,1060.74 4794.28,1051.71 4787.38,1043.15 4779.89,1035.11 4771.85,1027.62 4763.29,1020.72 4754.26,1014.45 4744.8,1008.84 4734.97,1003.92 4724.82,999.71 4714.39,996.24 4703.73,993.52 4692.92,991.57 4681.99,990.39 4671.71,990.03 4671,990.1 1675.1,990.1 1675.1,4105.9 4824.9,4105.9

## Other copper
Component Side:
  region net VCC_BATT_RAW: 2704.35,1604 2702.91,1602.56 2702.91,1506.33 2858.24,1320.6 2927,1320.6 2927,1477 2800,1604
  region net GND: 3120.76,1611 3248,1611 3248,1615.2 3364.4,1731.6 3470,1731.6 3470,1676.47 3470,1675.56 3540.7,1675.56 3540.7,1641.7 3458,1559 3120.76,1559
  region net NetC4_1: 3259,1820 3259,1731 3337.5,1731 3351.5,1745 3352.5,1744 3479,1744 3479,1688.83 3567,1688.83 3567,1816 3481,1816 3481,1870 3398.02,1870 3347.83,1820
  region net NetD3_1: 2493.06,1981.15 2576.97,1981.15 cw(c2576.97,1771.9) 2786.22,1771.9 2786.22,1662.29 2697.87,1662.04 2697.87,1727.76 ccw(c2658.74,1727.76) 2658.74,1766.9 2493.08,1766.9
  region net NetC4_1: 3655.25,1910.58
  region net VCC_BATT: 2171.22,1562 2171.22,1291.9 2206.47,1256.64 2256.22,1256.64 2256.22,1311.9 2331.77,1311.9 2436,1416.13 2436,1562
  region net VCC_3V3: 1926.22,2232.54 1924.33,2230.65 1924.33,2103.47 2323.03,2103.47 2323.66,2104.1 2323.66,2231.78
  region net GND: 2066.22,1577.17 2066.22,1320.5 2111.22,1320.5 2111.22,1576.9

## Text inside footprints (layer, text, board x,y; h text height)
J1: Top Overlay "*" at 1855.11,3117.01 h30